# EAGLE board power_bus (EAGLE 7.5.0)
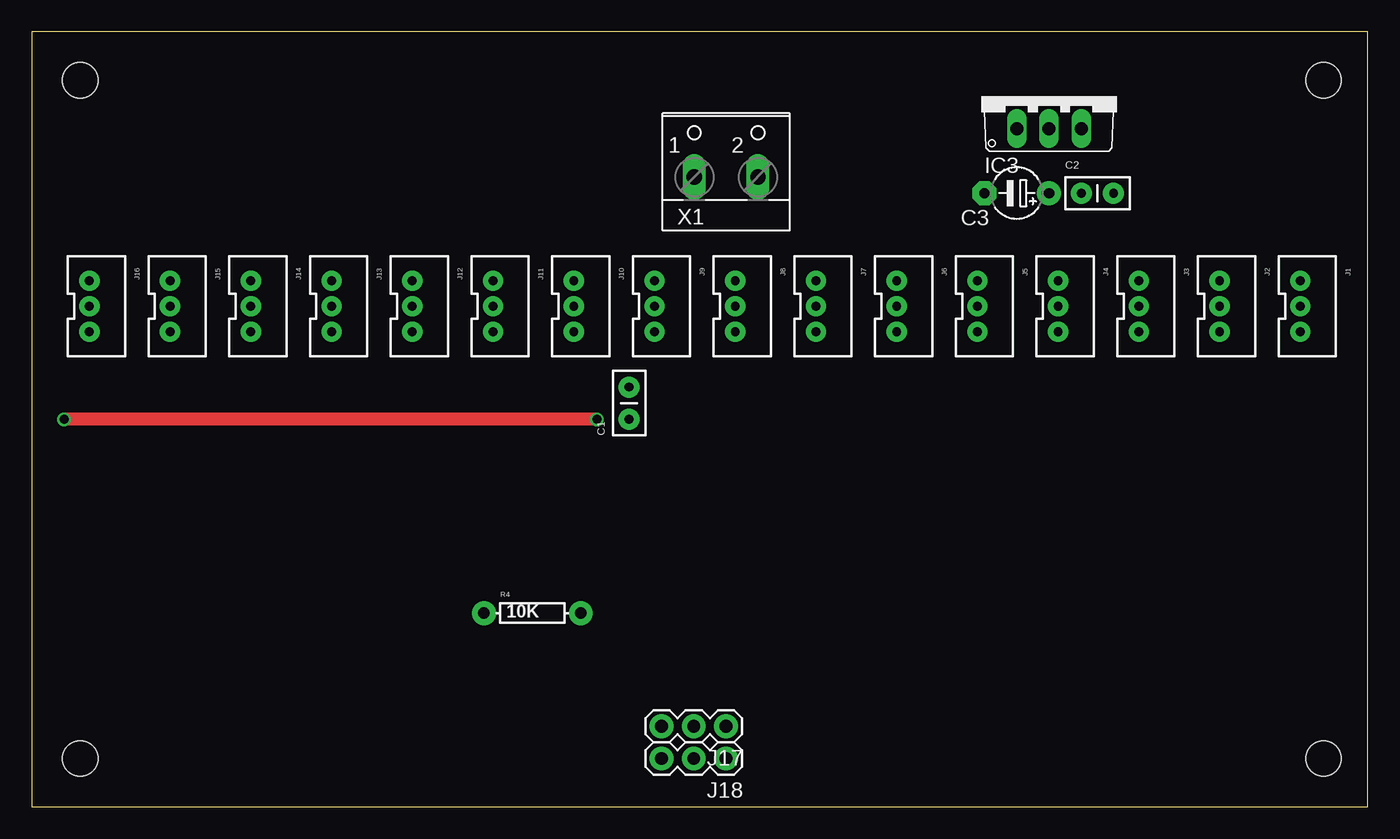
[diagram p0: board, top side]
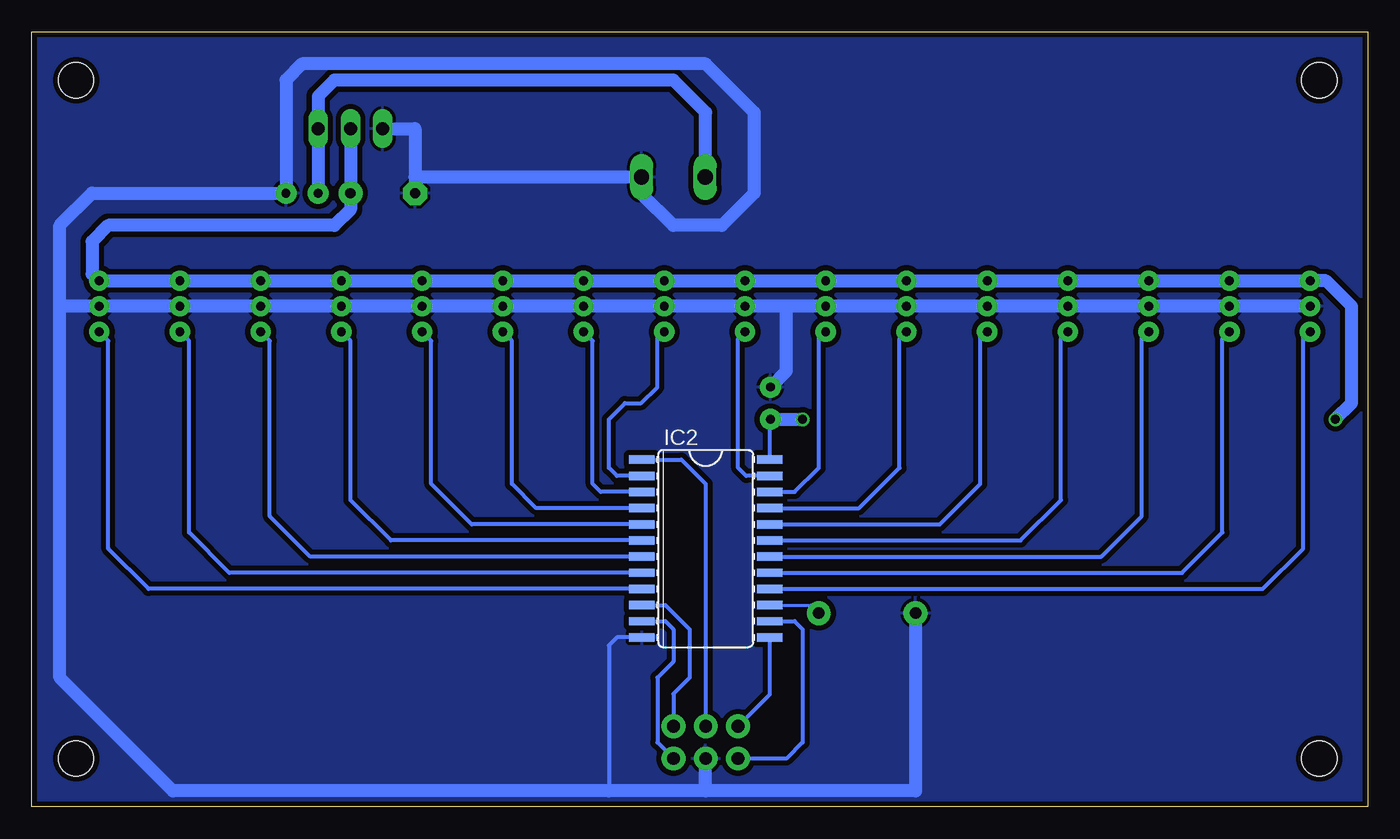
[diagram p1: board, bottom side, seen from below]

Size 105.08 x 60.95 mm. Coordinates in mm from the lower left corner, seen from the top.
Outline: 0,0 105.08,0 105.08,60.95 0,60.95 0,0
Copper layers (1*16): Top 0.0356mm / dielectric 1.5011mm / Bottom 0.0356mm
Design rules "LaenPCBOrder": minimum track width 6mil, minimum drill 13mil, track to track 6mil, track to pad 6mil, pad to pad 6mil, via to via 6mil, smd to smd 6mil, copper to edge 15mil, drill to drill 6mil, minimum pad ring 7mil, minimum via ring 7mil, stop-mask expansion 3mil, vias tented up to drill 0mil, thermal gap 10mil
Holes 2.8 mm at 101.6,57.15 101.6,3.81 3.81,3.81 3.81,57.15

## Footprints (pad centres in the part's own frame; a part is rotated, then mirrored left to right if it is on the bottom)
CAP-PTH-SMALLEZ = drill 0.7 pad 1.651: 1 0,0; 2 2.54,0
E5-4 = drill 0.813 pad 1.905: + -2.54,0 | drill 0.813 pad 1.905 octagon: - 2.54,0
SO24W = smd 0.66 x 2.032: 1 -6.985,-5.029; 2 -5.715,-5.029; 3 -4.445,-5.029; 4 -3.175,-5.029; 5 -1.905,-5.029; 6 -0.635,-5.029; 7 0.635,-5.029; 8 1.905,-5.029; 9 3.175,-5.029; 10 4.445,-5.029; 11 5.715,-5.029; 12 6.985,-5.029; 13 6.985,5.029; 14 5.715,5.029; 15 4.445,5.029; 16 3.175,5.029; 17 1.905,5.029; 18 0.635,5.029; 19 -0.635,5.029; 20 -1.905,5.029; 21 -3.175,5.029; 22 -4.445,5.029; 23 -5.715,5.029; 24 -6.985,5.029
TO220V = drill 1.016 long: 1 -2.54,-2.54; 2 0,-2.54; 3 2.54,-2.54
JST-3-PTH-VERT = drill 0.7 pad 1.6: 1 -2,-0.55; 2 0,-0.55; 3 2,-0.55
1X03 = drill 1.016 pad 1.88: 1 0,0; 2 2.54,0; 3 5.08,0
AXIAL-0.3 = drill 0.9 pad 1.88: P$1 -3.81,0; P$2 3.81,0
W237-102 = drill 1.194 long: 1 -2.5,-1.27; 2 2.5,-1.27

## Placement (x,y rotation side)
C1  0.1uF  [CAP-PTH-SMALLEZ]  46.99,30.48 90 top
C2  100nF  [CAP-PTH-SMALLEZ]  82.55,48.26 0 top
C3  10uF  [E5-4]  77.47,48.26 180 top
IC2  4067D  [SO24W]  52.07,20.32 270 bottom
IC3  MC33269T  [TO220V]  80.01,55.88 0 top
J1  [JST-3-PTH-VERT]  100.33,39.37 270 top
J2  [JST-3-PTH-VERT]  93.98,39.37 270 top
J3  [JST-3-PTH-VERT]  87.63,39.37 270 top
J4  [JST-3-PTH-VERT]  81.28,39.37 270 top
J5  [JST-3-PTH-VERT]  74.93,39.37 270 top
J6  [JST-3-PTH-VERT]  68.58,39.37 270 top
J7  [JST-3-PTH-VERT]  62.23,39.37 270 top
J8  [JST-3-PTH-VERT]  55.88,39.37 270 top
J9  [JST-3-PTH-VERT]  49.53,39.37 270 top
J10  [JST-3-PTH-VERT]  43.18,39.37 270 top
J11  [JST-3-PTH-VERT]  36.83,39.37 270 top
J12  [JST-3-PTH-VERT]  30.48,39.37 270 top
J13  [JST-3-PTH-VERT]  24.13,39.37 270 top
J14  [JST-3-PTH-VERT]  17.78,39.37 270 top
J15  [JST-3-PTH-VERT]  11.43,39.37 270 top
J16  [JST-3-PTH-VERT]  5.08,39.37 270 top
J17  [1X03]  54.61,6.35 180 top
J18  [1X03]  54.61,3.81 180 top
R4  10K  [AXIAL-0.3]  39.37,15.24 0 top
X1  [W237-102]  54.61,50.8 0 top

## Library data of the parts
C1 C2 = SparkFun-Capacitors
C3 = rcl
IC2 = 40xx
IC3 = linear
J1-J18 = SparkFun-Connectors
R4 = SparkFun-Passives
X1 = con-wago-500; MPN: 237-102; OC_FARNELL: unknown; OC_NEWARK: 70K9898

## Nets
MUX0: IC2.9 J1.3
MUX1: IC2.8 J2.3
MUX2: IC2.7 J3.3
MUX3: IC2.6 J4.3
MUX4: IC2.5 J5.3
MUX5: IC2.4 J6.3
MUX6: IC2.3 J7.3
MUX7: IC2.2 J8.3
MUX8: IC2.23 J9.3
MUX9: IC2.22 J10.3
MUX10: IC2.21 J11.3
MUX11: IC2.20 J12.3
MUX12: IC2.19 J13.3
MUX13: IC2.18 J14.3
MUX14: IC2.17 J15.3
MUX15: IC2.16 J16.3
MUX_A: IC2.10 J17.1
MUX_B: IC2.11 J18.1
MUX_C: IC2.14 J18.3
MUX_D: IC2.13 J17.3
MUX_X: IC2.1 J17.2
N$2: IC2.15 R4.P$2
VDD: C1.1 C3.+ IC2.24 IC3.2 J1.1 J2.1 J3.1 J4.1 J5.1 J6.1 J7.1 J8.1 J9.1 J10.1 J11.1 J12.1 J13.1 J14.1 J15.1 J16.1
VOLTAGE: C2.1 IC3.3 X1.1
VSS: C1.2 C2.2 C3.- IC2.12 IC3.1 J1.2 J2.2 J3.2 J4.2 J5.2 J6.2 J7.2 J8.2 J9.2 J10.2 J11.2 J12.2 J13.2 J14.2 J15.2 J16.2 J18.2 R4.P$1 X1.2

## Tracks (layer width: path | path; a pad name or v marks a point on that pad's centre or on a via)
MUX0
  Bottom 0.305: IC2.9 95.89,17.14 99.06,20.32 99.06,36.65 J1.3
MUX1
  Bottom 0.305: IC2.8 89.53,18.41 92.71,21.59 92.71,36.65 J2.3
MUX2
  Bottom 0.305: IC2.7 83.19,19.68 86.36,22.86 86.36,36.65 J3.3
MUX3
  Bottom 0.305: IC2.6 76.83,20.95 80.01,24.13 80.01,36.65 J4.3
MUX4
  Bottom 0.305: IC2.5 70.48,22.23 73.66,25.4 73.66,36.65 J5.3
MUX5
  Bottom 0.305: IC2.4 65.41,23.5 67.31,25.4 67.31,36.65 J6.3
MUX6
  Bottom 0.305: IC2.3 60.33,24.77 60.96,25.4 60.96,36.65 J7.3
MUX7
  Bottom 0.305: IC2.2 59.05,26.04 59.69,26.67 59.69,30.48 58.42,31.75 57.15,31.75 55.88,33.02 55.88,36.82 J8.3
MUX8
  Bottom 0.305: IC2.23 48.9,26.04 49.53,26.67 49.53,36.83 49.52,36.83 J9.3
MUX9
  Bottom 0.305: IC2.22 45.09,24.77 43.18,26.67 43.18,36.82 J10.3
MUX10
  Bottom 0.305: IC2.21 40.01,23.5 36.83,26.67 36.83,36.82 J11.3
MUX11
  Bottom 0.305: IC2.20 33.66,22.23 30.48,25.4 30.48,36.82 J12.3
MUX12
  Bottom 0.305: IC2.19 27.3,20.95 24.13,24.13 24.13,36.82 J13.3
MUX13
  Bottom 0.305: IC2.18 20.95,19.68 17.78,22.86 17.78,36.82 J14.3
MUX14
  Bottom 0.305: IC2.17 14.61,18.41 11.43,21.59 11.43,36.82 J15.3
MUX15
  Bottom 0.305: IC2.16 8.26,17.14 5.08,20.32 5.08,36.82 J16.3
MUX_A
  Bottom 0.305: IC2.10 55.24,15.88 53.34,13.97 53.34,10.16 54.61,8.89 J17.1
MUX_B
  Bottom 0.254: IC2.11 56.52,14.61
  Bottom 0.305: J18.1 55.88,5.08 55.88,10.16 54.61,11.43 54.61,13.97 55.24,14.61 56.52,14.61
MUX_C
  Bottom 0.305: IC2.14 45.09,14.61 44.45,13.97 44.45,5.08 45.72,3.81 J18.3
MUX_D
  Bottom 0.305: IC2.13 47.04,8.84 J17.3
MUX_X
  Bottom 0.305: IC2.1 53.98,27.3 52.07,25.4 J17.2
N$2
  Bottom 0.254: IC2.15 43.81,15.88 R4.P$2
VDD  (via drill 0.7 pad 0.61)
  Top 1.016: v44.45,30.48 v2.54,30.48
  Bottom 0.254: IC2.24 46.35,27.3
  Bottom 0.305: C1.1 47.04,30.43 IC2.24
  Bottom 1.016: IC3.2 C3.+ 80.01,46.99 81.28,45.72 99.06,45.72 100.33,44.45 100.33,41.92 J1.1 J2.1 J3.1 J4.1 J5.1 J6.1 J7.1 J8.1 J9.1 J10.1 J11.1 J12.1 J13.1 J14.1 J15.1 J16.1 3.27,41.37 1.27,39.37 1.27,31.75 v2.54,30.48 | C1.1 v44.45,30.48
VOLTAGE
  Bottom 1.016: X1.1 52.07,50.84 52.07,54.61 54.61,57.15 81.28,57.15 82.55,55.88 IC3.3 C2.1
VSS
  Bottom 0.305: IC2.12 59.05,13.34 59.69,12.7 59.69,1.27
  Bottom 1.016: J16.2 J15.2 J14.2 J13.2 J12.2 | 30.48,39.37 J12.2 | J12.2 J11.2 J10.2 45.72,39.37 | 45.72,39.37 J9.2 J8.2 | 55.88,39.37 J8.2 | J8.2 J7.2 J6.2 J5.2 | 74.93,39.37 J5.2 | J5.2 J4.2 J3.2 J2.2 J1.2 | 52.07,1.27 35.56,1.27 R4.P$1 | 52.07,1.27 J18.2 | IC3.1 74.93,53.34 C3.- 74.93,49.53 X1.2 57.11,48.22 54.61,45.72 50.8,45.72 48.26,48.26 48.26,54.61 52.07,58.42 83.82,58.42 85.09,57.15 C2.2 100.33,48.26 102.87,45.72 102.87,39.37 | J8.2 102.87,39.37 | 52.07,1.27 59.69,1.27 93.98,1.27 102.87,10.16 102.87,39.37 | C1.2 45.72,34.29 45.72,39.37
  pour Bottom (isolate 0.406): 0,0 0,60.96 105.41,60.96 105.41,0